# Altium PCB ECEN404_Team54_PCB_V2.PcbDoc
Units mil, origin at the board's own origin, x right, y up, seen from the top; angles counter-clockwise.
Board outline 2365 x 1675 mil, 2 copper layers (Top Layer, Bottom Layer); 19 components, 15 nets, 101 pads, 16 vias.
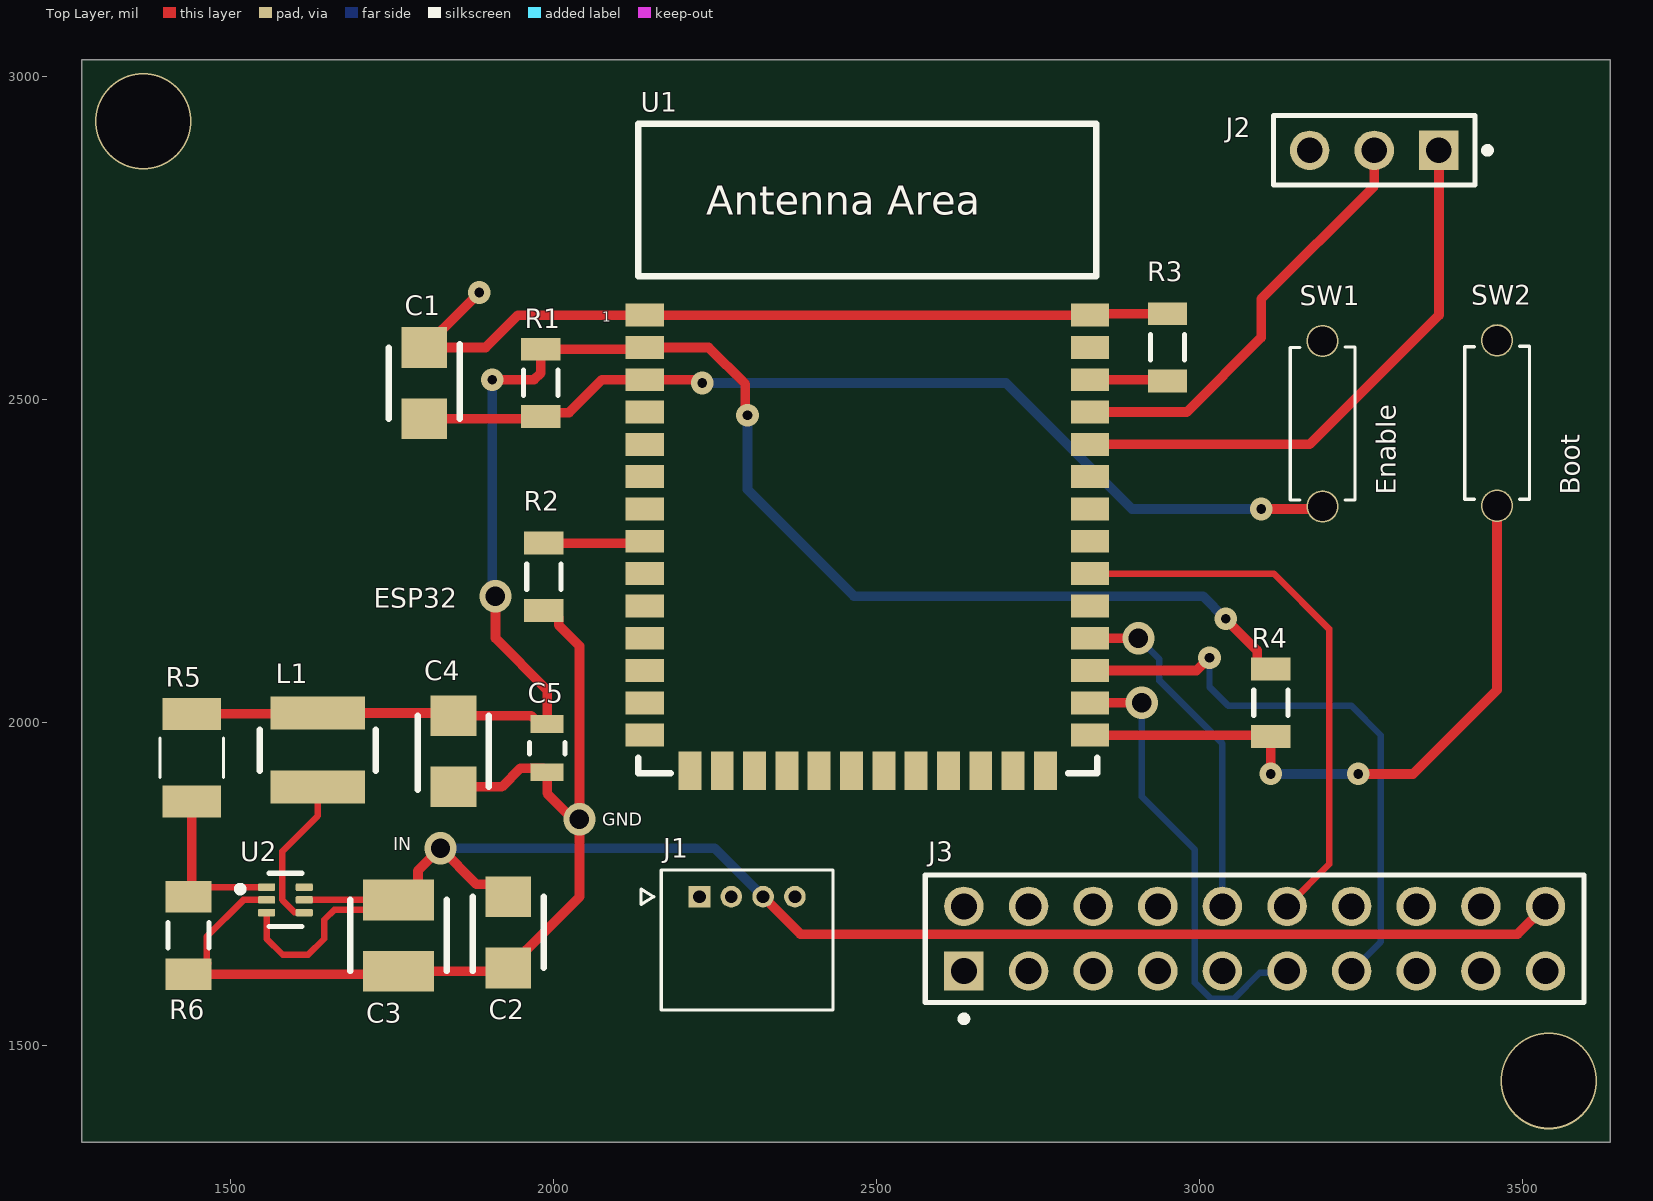
[diagram p0: Top Layer view]
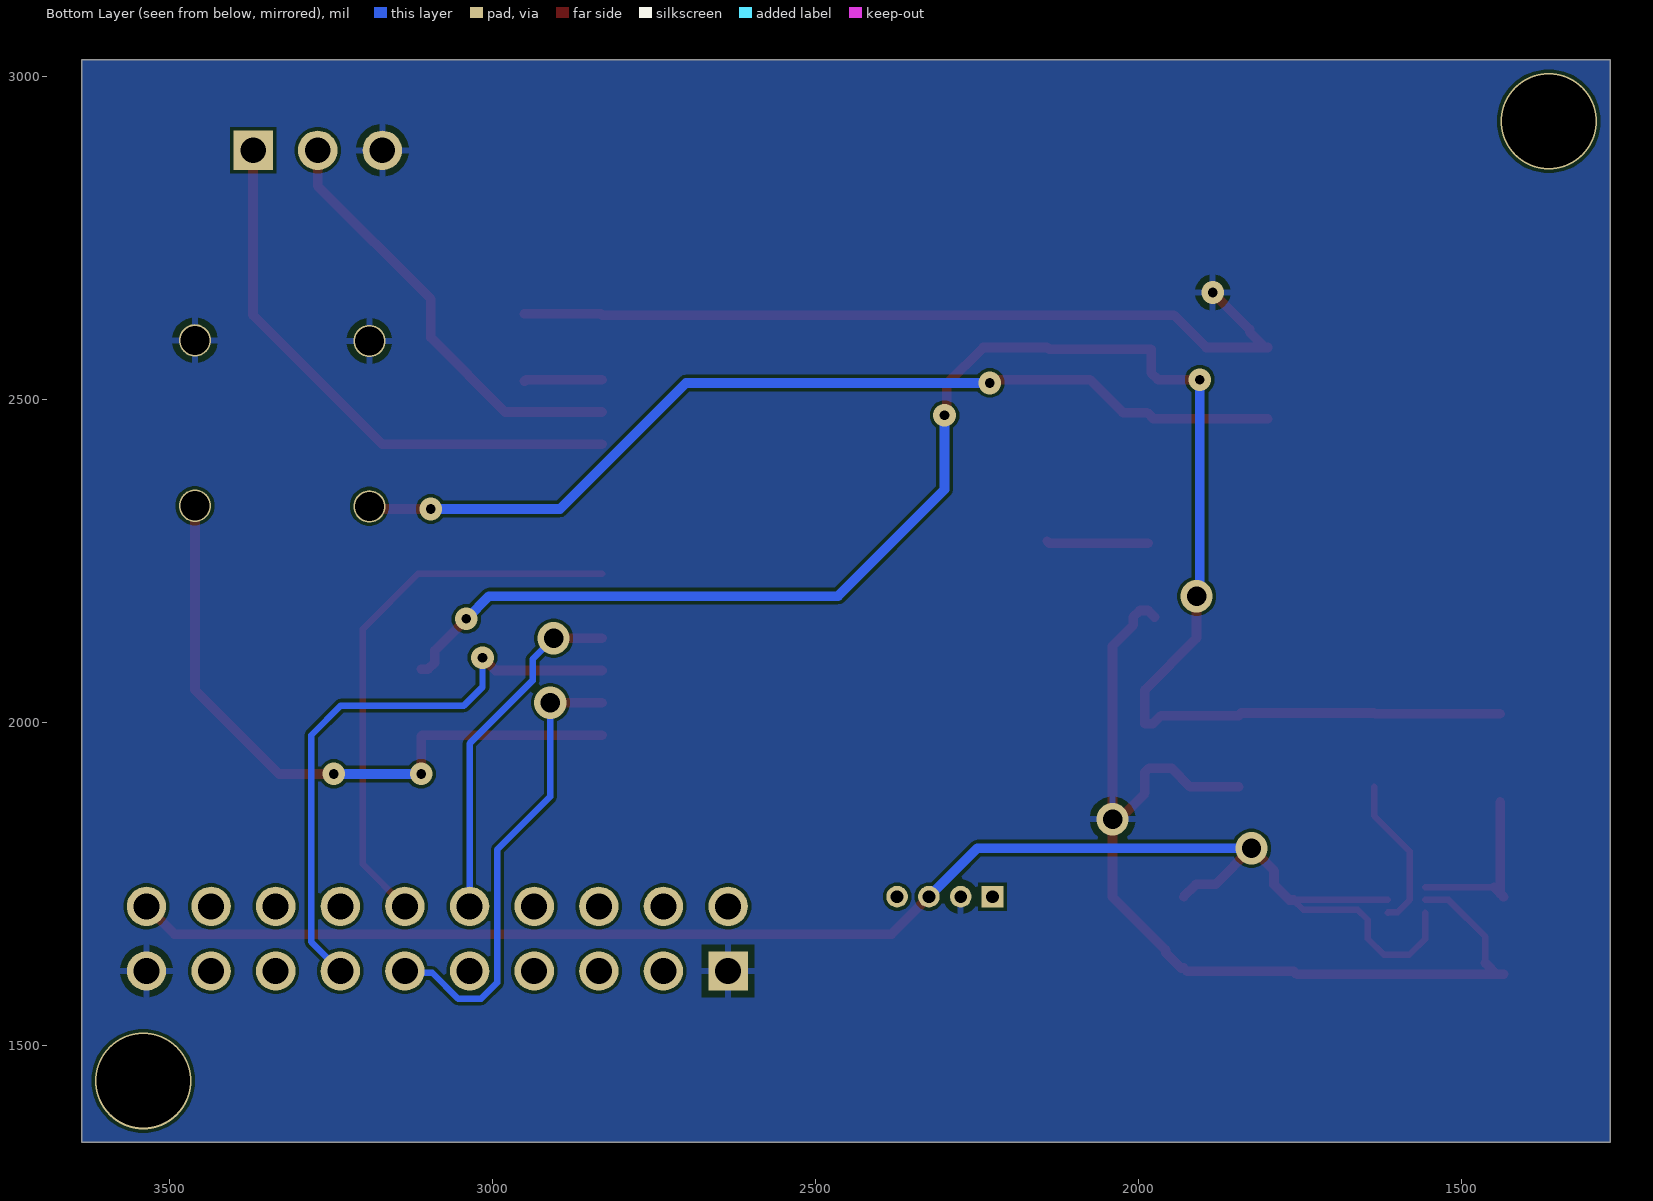
[diagram p1: Bottom Layer view, seen from below]

## Layer stack, top to bottom
Top Solder: solder mask 0.4, Solder Resist, Dk 3.5
Top Layer: signal copper 1.4
Dielectric 1: dielectric 12.6, FR-4, Dk 4.8
Bottom Layer: signal copper 1.4
Bottom Solder: solder mask 0.4, Solder Resist, Dk 3.5

## Board outline
1270,1350 3635,1350 3635,3025 1270,3025

## Design rules (kind name [scope] priority, off if disabled: settings)
Clearance [All] p1: gap=5 ignorepadtopadclearanceinfootprint=FALSE
MinimumSolderMaskSliver [All] p1: minsoldermaskwidth=5
PolygonConnect [All] p1: connectstyle=Relief reliefconductorwidth=10 reliefentries=4 polygonreliefangle="90 Angle" airgapwidth=10
RoutingVias [All] p1: holewidth=15 width=35 viastyle="Through Hole" minholewidth=10 minwidth=30 maxholewidth=100 maxwidth=250
SilkToSilkClearance [All] p1: silktosilkclearance=5
SilkToSolderMaskClearance [IsPad] p1: minsilkscreentomaskgap=5 clearancetoexposedcopper=TRUE
SolderMaskExpansion [All] p1: expansion=4 istentingtop=FALSE
SupplyNets "Schematic Supply Nets" [InNet('GND')] p1: voltage=0.000
Width [All] p1: maxlimit=1000 minlimit=5 preferedwidth=10
27 further rules are at their usual default settings.

## Classes and differential pairs
component class "ESP32 Voltage": C2 C3 C4 C5 L1 R5 R6 U2
component class ECEN404_Team54_V2: C1 J1 J2 J3 R1 R2 R3 R4 SW1 SW2 U1

## Components (designator, comment, footprint, x,y, rotation, side; value= is the part's Value field where it differs from the comment)
C1 "GMC31X7R104K6R3NT" "1206 Capacitor" 1800,2469.76 r90 top value="0.1 uF"
C2 "GMC31X7R104K6R3NT" "1206 Capacitor" 1930,1730 r270 top value="0.1 uF"
C3 "12101C475K4T2A" 12101C47 1760,1725 r270 top value="4.7 uF"
C4 "GMC31X7R104K6R3NT" "1206 Capacitor" 1845,2010.24 r270 top value="0.1 uF"
C5 "GRM21BR60J226ME39L" FP-GRM21B-0_15-MFG 1990,1960 r270 top
J1 "530480410" MOLEX_530480410 2225.79,1730 r0 top
J2 "PREC003SAAN-RC" FP-PREC003SAAN-RC-MFG 3270,2885 r180 top
J3 "PPPC102LFBN-RC" SLIN-PPPC102LFBN-RC_V 3085,1665 r0 top
L1 "1 uH" TYA40121R0M-10 1635,1900 r90 top
R1 "10kOhm" RESC3216X70X50LL05T20 1980,2525 r270 top
R2 "10kOhm" RESC3216X70X50LL05T20 1985,2225 r90 top
R3 "10kOhm" RESC3216X70X50LL05T20 2950,2580 r90 top
R4 "10kOhm" RESC3216X70X50LL05T20 3110,2030 r90 top
R5 "453KOhm" RES_ERJP14F4533U 1440,1945 r90 top
R6 "RC1206FR-07100KL" RESC3116X65X40ML10T20 1435,1670 r90 top
SW1 "MJTP1243" MJTP1243 3190,2334 r90 top
SW2 "MJTP1243" MJTP1243 3460,2335 r90 top
U1 "ESP32-S3-WROOM-1" ESP32-WROOM1 2141.02,2630 r0 top
U2 "TLV62568ADRLR" FP-DRL0006A-MFG 1585,1725 r0 top

## Footprints (in the part's own frame and the unit in brackets; to place one, negate y for a bottom-side part, rotate by r counter-clockwise, add the part's x,y. Pads: shape width x height; smd on the part's side, far side on the other; paste and mask are expansions set on the pad)
"1206 Capacitor" [mm] "Capacitor X7R 1206 (3216 Metric)"
  rect 1.6x1.8 smd: 1(0,0) 2(2.8,0)
  silkscreen extent 0,-1.4 2.92,1.4, body extent -0.2,-0.8 3,0.8, height 0.94
12101C47 [mm] "CAP CER 4.7UF 100V X7R 1210"
  rect 1.6x2.8 smd: 1(0,0) 2(2.8,0)
  silkscreen extent 0,-1.91 2.79,1.91, body extent -0.2,-1.25 3,1.25, height 1
ESP32-WROOM1 [mm] "RF TXRX MOD BT WIFI PCB TH SMD"
  rect 1.5x0.9 smd: 1(0,0) 2(0,-1.27) 3(0,-2.54) 4(0,-3.81) 5(0,-5.08) 6(0,-6.35) 7(0,-7.62) 8(0,-8.89) 9(0,-10.16) 10(0,-11.43) 11(0,-12.7) 12(0,-13.97) 13(0,-15.24) 14(0,-16.51) 27(17.5,-16.51) 28(17.5,-15.24) 29(17.5,-13.97) 30(17.5,-12.7) 31(17.5,-11.43) 32(17.5,-10.16) 33(17.5,-8.89) 34(17.5,-7.62) 35(17.5,-6.35) 36(17.5,-5.08) 37(17.5,-3.81) 38(17.5,-2.54) 39(17.5,-1.27) 40(17.5,0)
  rect 0.9x1.5 smd: 15(1.778,-17.907) 16(3.048,-17.907) 17(4.318,-17.907) 18(5.588,-17.907) 19(6.858,-17.907) 20(8.128,-17.907) 21(9.398,-17.907) 22(10.668,-17.907) 23(11.938,-17.907) 24(13.208,-17.907) 25(14.478,-17.907) 26(15.748,-17.907)
  silkscreen extent -0.25,-18.01 17.78,7.52, body extent -0.25,-18.03 17.75,7.47, height 3.25
FP-DRL0006A-MFG [mm]
  rrect33% 0.67x0.3 smd paste+0 mask+0: 1(-0.74,0.5) 2(-0.74,0) 3(-0.74,-0.5) 4(0.74,-0.5) 5(0.74,0) 6(0.74,0.5)
  silkscreen extent -1.9,-1.05 0.65,1.05, body extent -1.17,-1.1 1.17,1.1, height 0.25
FP-GRM21B-0_15-MFG [mm]
  rect 0.7x1.3 smd paste+0 mask+0: 1(-0.95,0) 2(0.95,0)
  silkscreen extent -0.23,-0.7 0.23,0.7, body extent -1.4,-0.8 1.4,0.8, height 0.25
FP-PREC003SAAN-RC-MFG [mm]
  rect 1.55x1.55 hole 1 paste-2539.97 mask+0: 1(-2.54,0)
  round 1.55 hole 1 paste-2539.97 mask+0: 2(0,0) 3(2.54,0)
  silkscreen extent -4.58,-1.37 3.96,1.37, body extent -4.06,-1.47 4.06,1.47, height 0.25
MJTP1243 [mil] "Tactile Switch SPST-NO Top Actuated Through Hole"
  round 50 hole 45 mask+3: 1(0,0) 2(256,0)
  silkscreen extent 10,-50 247,50
MOLEX_530480410 [mm]
  rect 0.85x0.85 / inner round 0.85 / far side rect 0.85x0.85 hole 0.5 mask+0.076: 1(0,0)
  round 0.85 hole 0.5 mask+0.076: 2(1.25,0) 3(2.5,0) 4(3.75,0)
  silkscreen extent -2.3,-4.45 5.25,1.05
RES_ERJP14F4533U [mm]
  rect 1.25x2.3 smd: 1(-1.725,0) 2(1.725,0)
  silkscreen extent -0.78,-1.25 0.78,1.25
RESC3116X65X40ML10T20 [mm] "Chip Resistor, 2-Leads, Body 3.10x1.60mm, IPC Low Density"
  rect 1.25x1.8 smd: 1(-1.525,0) 2(1.525,0)
  silkscreen extent -0.5,-0.8 0.5,0.8, body extent -1.6,-0.85 1.6,0.85, height 0.65
RESC3216X70X50LL05T20 [mm] "Chip Resistor, 2-Leads, Body 3.20x1.60mm, IPC High Density"
  rect 0.9x1.55 smd: 1(-1.325,0) 2(1.325,0)
  silkscreen extent -0.5,-0.67 0.5,0.67, body extent -1.63,-0.82 1.62,0.82, height 0.7
SLIN-PPPC102LFBN-RC_V [mm] "THD, 20-Leads, Body 25.9x5mm, Pitch 2.54mm"
  rect 1.55x1.55 hole 1.02: 1(-11.43,-1.27)
  round 1.55 hole 1.02: 2(-11.43,1.27) 3(-8.89,-1.27) 4(-8.89,1.27) 5(-6.35,-1.27) 6(-6.35,1.27) 7(-3.81,-1.27) 8(-3.81,1.27) 9(-1.27,-1.27) 10(-1.27,1.27) 11(1.27,-1.27) 12(1.27,1.27) 13(3.81,-1.27) 14(3.81,1.27) 15(6.35,-1.27) 16(6.35,1.27) 17(8.89,-1.27) 18(8.89,1.27) 19(11.43,-1.27) 20(11.43,1.27)
  silkscreen extent -12.95,-3.27 12.95,2.5, body extent -12.95,-2.5 12.95,2.5, height 8.75
TYA40121R0M-10 [mm] "FIXED IND 1UH 3A 59 MOHM SMD"
  rect 1.3x3.7 smd: 1(0,0) 2(2.9,0)
  silkscreen extent 0.63,-2.29 2.23,2.29, body extent -0.48,-1.91 3.52,2.09, height 1.2

## Part data
C1 C2 C4: "0.1 µF ±10% 6.3V Ceramic Capacitor X7R 1206 (3216 Metric)"
C3: library part 12101C47, "CAP CER 4.7UF 100V X7R 1210"
C5: library part CMP-2007-03385-2, "Chip Multilayer Ceramic Capacitors for General Purpose, 0805, 22uF, X5R, 15%, 20%, 6.3V", Capacitance=22uF, Case Code (Imperial)=0805, Case Code (Metric)=2012, Dielectric=X5R, Max Operating Temperature=85°C, Min Operating Temperature=-55°C, Package Quantity=1, Tolerance=20%, Voltage=6.3V, Case/Package=0805, Depth=1.25mm, Height=1.25mm, Lead Free="Lead Free", Length=2mm, Material=Ceramic, Mount="Surface Mount", Packaging="Tape and Reel", Radiation Hardening=No, REACH SVHC="No SVHC", Termination=SMD/SMT, Thickness=0.053inch, Voltage Rating=6.3V, Voltage Rating (DC)=6.3V, Width=0.049inch
J1: Package=None, Availability=Unavailable, MP=530480410, Price=None
J2: library part CMP-00595-22265080-1, "PREC003SAAN-RC Conn Header Vert 3POS 2.54MM", Color=Black, Current Rating=3A, Max Operating Temperature=105°C, Min Operating Temperature=-40°C, Connector Type="Male Pin", Contact Material="Nickel, Tin", Contact Mating Length=5.842mm, Contact Plating=Tin, Height=8.74mm, Mount="Through Hole", NexarPartId=22265080, Number of Contacts=3, Number of Positions=3, Number of Rows=1, Packaging=Bulk, Pitch=2.54mm, RoHS=Compliant, Termination=Solder
J3: library part CMP-1770-00003-1, "Female Header, Pitch 2.54 mm, 2 x 10 Position, Height 8.75 mm, Tail Length 3.2 mm, -40 to 105 degC, RoHS, Bulk", Case\Package=SOIC, Frequency="100 KHz", Max Operating Temperature="70 degC", Max Ouput Current="-200 mA", Max Supply Voltage="16 V", Min Operating Temperature="0 degC", Min Supply Voltage="4.5 V", Package Quantity=2500, ComponentLink1Description=Datasheet, ComponentLink1URL=http://datasheet.octopart.com/PPPC102LFBN-RC-Sullins-datasheet-8327184.pdf, DatasheetVersion="Rev. D, 10/2007", Height="1.58 mm", Length="4.9 mm", Mount="Surface Mount", PackageDescription="Female Header, Pitch 2.54 mm, 2 x 10 Position, Height 8.75 mm, Tail Length 3.2 mm", PackageReference=PPPC102LFBN-RC, Packaging="Tape and Reel", Pins=8, Radiation Hardening=No, REACH SVHC="No SVHC", RoHSCompliant=true, Weight="0.002561 oz", Width="3.91 mm"
L1: library part TYA40121R0M-10, "TYA40121R0M-10, FIXED IND 1UH 3A 59 MOHM SMD"
R1 R2 R3 R4: library part CMP-2003-00018-1, "ERJ-8ENF1002V", Manufacturer=Panasonic, Part Number=ERJ-8ENF1002V
R5: library part ERJP14F4533U, "ERJP14F4533U", Package=None, Availability=Unavailable, MP=ERJP14F4533U, Price=None
R6: library part CMP-2100-03674-1, "Chip Resistor, 100 KOhm, +/- 1%, 0.25 W, -55 to 155 degC, 1206 (3216 Metric), RoHS, Tape and Reel", Case Code (Imperial)=1206, Case Code (Metric)=3216, Manufacturer=Yageo, Max Operating Temperature=155degC, Min Operating Temperature=-55degC, Package Description="2-Pin Surface Mount Device, Body 3.1 x 1.6 mm", Package Reference=1206.0, Power Rating=250mW, Resistance=100KOhm, Temperature Coefficient=100ppm/degreesC, Tolerance=1%, Voltage Rating=200V, Case/Package=1206, Composition=ThickFilm, Datasheet URL=http://www.yageo.com/NewPortal/yageodocoutput?fileName=/pdf/R-Chip/PYu-RC_Group_51_RoHS_L_5.pdf, Datasheet Version="Rev. 5, 10/2016", Depth=1.6mm, Height=0.55mm, Lead Free=LeadFree, Length=3.1mm, Manufacturer URL=http://www.yageo.com/, Packaging=TapeandReel, REACH SVHC=NoSVHC, RoHSCompliant=true, Termination=SMD/SMT
SW1 SW2: "Tactile Switch SPST-NO Top Actuated Through Hole"
U1: library part ESP32-WROOM1, "RF TXRX MOD BT WIFI PCB TH SMD"
U2: library part CMP-04918-000153-1, "IC REG BUCK ADJUSTABLE 2A SOT563", Case/Package=SOT-563, Max Input Voltage=5.5V, Max Operating Temperature=125°C, Min Input Voltage=2.5V, Min Operating Temperature=-40°C, Min Output Voltage=600mV, Output Current=2A, Switching Frequency=1.5MHz, Max Output Voltage=5.5V, Mount="Surface Mount", Number of Outputs=1, Output Configuration=Positive, Output Type=Adjustable, Packaging="Tape and Reel", Synchronous Rectifier=Yes

## Via types
v1: diameter 35, hole 15, Top Layer to Bottom Layer, tented both sides, 9 vias
v2: diameter 50, hole 30, Top Layer to Bottom Layer, tented both sides, 5 vias
v3: diameter 150, hole 145, Top Layer to Bottom Layer, tented both sides, 2 vias

## Nets (pads, with @x,y where several pads share a name; then routed paths per layer and width w, separated by ;. In a path a pad name is that pad's centre, name@x,y a point inside that pad or via, vN(x,y) a via of type N, cw(c..) or ccw(c..) an arc to the next point about the centre after c; other vN are vias at no path point)
Boot: R4.1 SW2.1 U1.27 | length 1027.6
  Top Layer w15: U1.27 3107.83,1980 R4.1 v1(3110,1920) ; v1(3245,1920) 3330,1920 3460,2050 SW2.1
  Bottom Layer w15: v1(3110,1920) v1(3245,1920)
EN: C1.1 R1.2 SW1.1 U1.3 | length 1499.5
  Top Layer w15: C1.1 1976.93,2469.76 R1.2 1986.11,2478.94 2023.94,2478.94 2075,2530 U1.3 2219.59,2530 2224.59,2525 v1(2230,2525) ; v1(3095,2330) 3186,2330 SW1.1
  Bottom Layer w15: v1(2230,2525) 2700.12,2525 2895.12,2330 v1(3095,2330)
ESP32: C4.1 C5.1 L1.2 R1.1 R4.2 R5.2 U1.2 | length 2683.7
  Top Layer w15: R5.2 1633.74,2012.91 L1.2 1841.06,2014.17 C4.1 1965.35,2010.24 1978.19,1997.4 C5.1 1990,2050 1910,2130 v2(1910,2195) ; v1(1905,2530) 1970,2530 1980,2540 R1.1 2138.19,2577.17 U1.2 2240,2580 2296.72,2523.28 2296.72,2478.28 v1(2300,2475) ; v1(3040,2160) 3088.89,2111.11 3088.89,2092.38 3099.11,2082.17 R4.2
  Bottom Layer w15: v1(1905,2530) 1905,2200 v2(1910,2195) ; v1(2300,2475) 2300,2360 2465,2195 3005,2195 v1(3040,2160)
GND: C1.2 C2.2 C3.2 C4.2 C5.2 J1.2 J2.3 J3.1 J3.19 R2.1 R3.2 R6.1 SW1.2 SW2.2 U1.1 U1.40 U2.2 | length 2872.2
  Top Layer w10: R6.1@1462.93,1627.07 1462.93,1667.93 1520,1725 U2.2
  Top Layer w15: R6.1 R6.1@1445.83,1609.96 ; R6.1@1462.93,1627.07 R6.1@1445.83,1609.96 ; C1.2 C1.2@1803.94,2580 ; C4.2 1920,1900 1948.88,1928.88 1983.72,1928.88 C5.2 1990,1890 2023.3,1856.7 v2@2040,1856.7 ; v1(1885,2665) 1827.93,2607.93 1827.93,2604 C1.2@1803.94,2580 ; R2.1@1975,2162.83 R2.1 1997.8,2172.83 2008.01,2162.62 2008.01,2149.82 2040,2117.83 v2@2040,1856.7 ; R3.2 2832.17,2632.17 U1.40 U1.1 1945,2630 1895,2580 C1.2@1803.94,2580 ; R6.1@1445.83,1609.96 1755.2,1609.96 C3.2 1925,1614.76 C2.2 1933.94,1619.76 1957.93,1643.76 1957.93,1647.7 2040,1729.76 v2(2040,1850) v2@2040,1856.7
IN: C2.1 C3.1 J1.3 J3.20 U2.3 U2.5 | length 2482.5
  Top Layer w10: U2.3 1555.87,1665 1580.87,1640 1620,1640 1645,1665 1645,1694.14 1660.86,1710 1745,1710 C3.1 U2.5
  Top Layer w15: C3.1 1766.21,1725 1790.21,1749 1790.21,1770.21 v2(1825,1805) 1880.85,1749.15 1910.85,1749.15 C2.1 ; J1.3 2382.22,1671.99 3491.99,1671.99 J3.20
  Bottom Layer w15: v2(1825,1805) 2249.21,1805 J1.3
NetL1_1: L1.1 U2.4 | length 240.1
  Top Layer w10: U2.4 1613.23,1706.22 1598.78,1706.22 1580,1725 1580,1800 1635,1855 L1.1
NetR2_2: R2.2 U1.8 | length 157.2
  Top Layer w15: R2.2 2138.19,2277.17 U1.8
NetR3_1: R3.1 U1.38 | length 120.9
  Top Layer w15: U1.38 2947.83,2530 R3.1
NetR5_1: R5.1 R6.2 U2.1 | length 269
  Top Layer w10: R6.2@1449.65,1744.68 U2.1
  Top Layer w15: R6.2 R6.2@1440,1735.04 ; R5.1 R6.2@1440,1735.04 ; R6.2@1449.65,1744.68 R6.2@1440,1735.04
RXD0: J2.1 U1.36 | length 877.8
  Top Layer w15: U1.36 3170,2430 3370,2630 J2.1
SPI_CLK: J3.13 U1.29 | length 928.9
  Top Layer w15: U1.29 2995,2080 v1(3015,2100)
  Bottom Layer w10: v1(3015,2100) 3015,2054.42 3043.67,2025.75 3234.25,2025.75 3280,1980 3280,1660 J3.13
  Bottom Layer w15: J3.13@3227.52,1622.48 J3.13
SPI_CS: J3.12 U1.32 | length 861.8
  Top Layer w10: U1.32 3114.35,2230 3200,2144.35 3200,1780 J3.12
SPI_MISO: J3.10 U1.30 | length 543.8
  Top Layer w15: U1.30 v2(2905,2130)
  Bottom Layer w10: v2(2905,2130) 2937.5,2097.5 2937.5,2064.47 3035,1966.97 J3.10
SPI_MOSI: J3.11 U1.28 | length 718
  Top Layer w15: U1.28 v2(2910,2030)
  Bottom Layer w10: v2(2910,2030) 2910,1885 2991.99,1803.01 2991.99,1597.18 3017.18,1571.99 3052.82,1571.99 3092.93,1612.1 J3.11@3132.1,1612.1
  Bottom Layer w15: J3.11@3132.1,1612.1 J3.11
TXD0: J2.2 U1.37 | length 675.1
  Top Layer w15: U1.37 2980,2480 3095,2595 3095,2655 3270,2830 J2.2
pads on no net: J1.1 J1.4 J3.2 J3.3 J3.4 J3.5 J3.6 J3.7 J3.8 J3.9 J3.14 J3.15 J3.16 J3.17 J3.18 U1.4 U1.5 U1.6 U1.7 U1.9 U1.10 U1.11 U1.12 U1.13 U1.14 U1.15 U1.16 U1.17 U1.18 U1.19 U1.20 U1.21 U1.22 U1.23 U1.24 U1.25 U1.26 U1.31 U1.33 U1.34 U1.35 U1.39 U2.6
copper on no net:
  other v3: 3540,1445 1365,2930

## Polygon pours and split planes (outlines as drawn)
GND on Bottom Layer "NONET_L-01_P-001" (solid, pour order 1): 1270,3025 1270,1350 3635,1350 3635,3025 3605,3025

## Silkscreen, mask and mechanical layers (free items; w line width, h text height)
Top Overlay:
  text "Enable" at 3303,2352 h30 r90
  text "Boot" at 3588,2352 h30 r90
  text "ESP32" at 1722,2177 h30
  text "GND" at 2075,1840 h20
  text "IN" at 1752,1802 h20
Mechanical 1:
  the board outline again, w10

## Text inside footprints (layer, text, board x,y; h text height)
U1: Top Overlay "1" at 2075,2620 h15; Top Overlay "Antenna Area" at 2236.02,2785 h45